# Allegro board demob2.brd
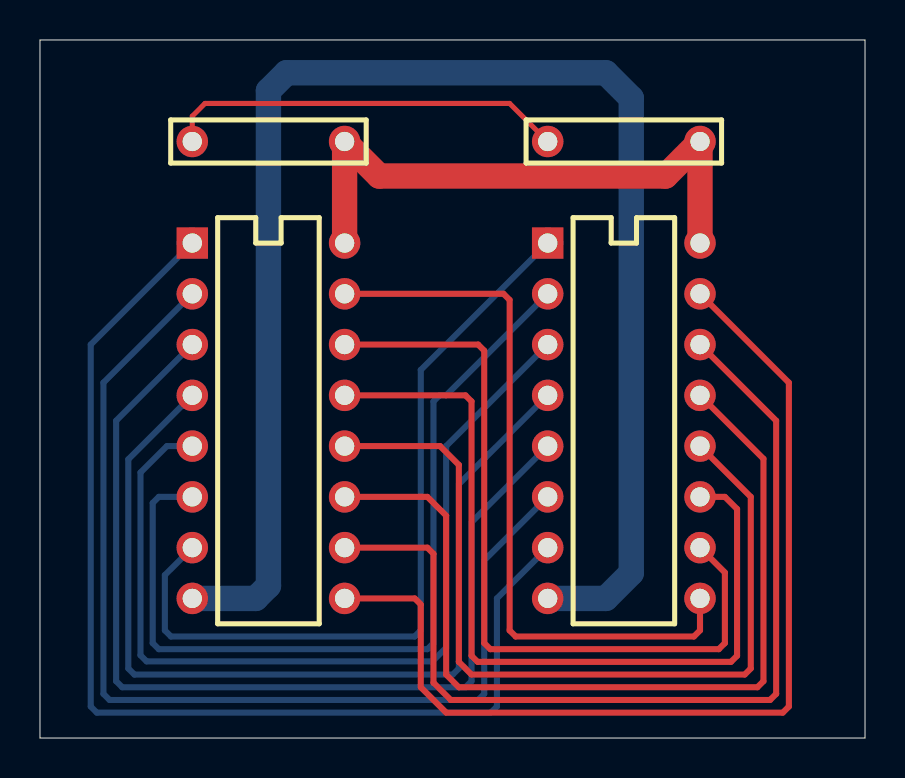
[diagram p0: board, top side]
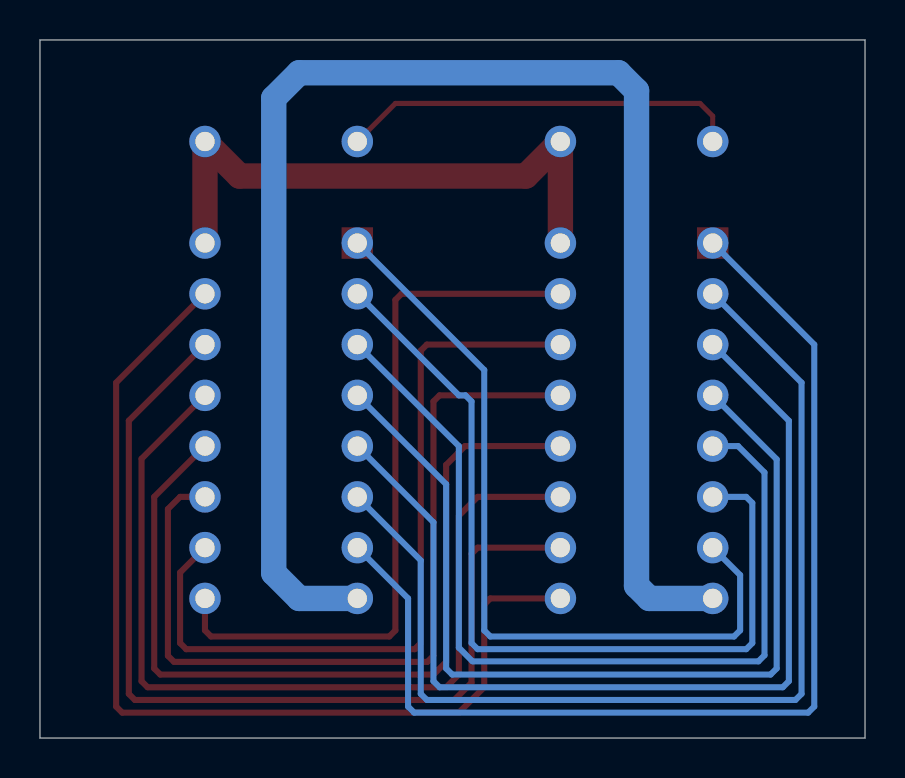
[diagram p1: board, bottom side, seen from below]

Outline 41.27 x 34.93 mm; copper layers: TOP, GND, POWER, INNER1, INNER2, BOTTOM. Coordinates in mm from the lower left corner of the outline.
Outline path: 0,34.93 41.27,34.93 41.27,0 0,0 0,34.93

## Design rules (mm)
nets with their own width: min track width 0.254; nets GND_SIGNAL
nets with their own width: min track width 0.305; nets N01899 N01900 N01901 N01902 N01903 N01904 N01905 N01906 N01907 N01908 N01909 N01910 N01911 N01912
nets with their own width: min track width 1.27; nets GND VCC

## Placement (name value [footprint] x y rotation side)
C1  CAP NP  [AC300100A]  15.24 29.85 180 top
C2  CAP NP  [AC300100A]  33.02 29.85 180 top
U1  74LS158  [DIP16]  7.62 24.77 270 top
U2  74LS158  [DIP16]  25.4 24.77 270 top

## Library data of the parts
C1 C2 = CAP_NP
U1 U2 = 74LS158

## Footprints (pads in the part's own frame, mm; a bottom-side part is the same pattern mirrored in y, then rotated)
AC300100A
  round 1.575 hole 0.965: 1(0,0) 2(7.62,0)
DIP16
  rect 1.575x1.575 hole 0.965: 1(0,0)
  round 1.575 hole 0.965: 2(2.54,0) 3(5.08,0) 4(7.62,0) 5(10.16,0) 6(12.7,0) 7(15.24,0) 8(17.78,0) 9(17.78,7.62) 10(15.24,7.62) 11(12.7,7.62) 12(10.16,7.62) 13(7.62,7.62) 14(5.08,7.62) 15(2.54,7.62) 16(0,7.62)

## Nets
GND: U1.8(TP-8) U2.8(TP-8)
GND_SIGNAL: C1.2(TP-2) C2.2(TP-2)
VCC: C1.1(TP-1) C2.1(TP-1) U1.16(TP-16) U2.16(TP-16)
N01899: U1.2(TP-2) U2.6(TP-6)
N01900: U1.3(TP-3) U2.5(TP-5)
N01901: U1.4(TP-4) U2.4(TP-4)
N01902: U1.5(TP-5) U2.3(TP-3)
N01903: U1.6(TP-6) U2.2(TP-2)
N01904: U1.7(TP-7) U2.1(TP-1)
N01905: U1.9(TP-9) U2.15(TP-15)
N01906: U1.10(TP-10) U2.14(TP-14)
N01907: U1.11(TP-11) U2.13(TP-13)
N01908: U1.12(TP-12) U2.12(TP-12)
N01909: U1.14(TP-14) U2.10(TP-10)
N01910: U1.1(TP-1) U2.7(TP-7)
N01911: U1.13(TP-13) U2.11(TP-11)
N01912: U1.15(TP-15) U2.9(TP-9)

## Routing (per net, layer and track width the routed paths; a pad name or vN(x,y) marks a point on that pad's centre or on a via; arc(x,y) is an arc through that point)
GND: length 76.4
  BOTTOM w1.27: U1.8 10.79,6.99 11.43,7.62 11.43,32.39 12.33,33.28 28.31,33.28 29.58,32.01 29.58,8.25 28.31,6.99 U2.8
GND_SIGNAL: length 20.1
  TOP w0.254: C1.2 7.62,31.11 8.26,31.75 23.5,31.75 C2.2
VCC: length 29.4
  TOP w1.27: U1.16 C1.1 16.97,28.12 31.29,28.12 C2.1 U2.16
N01899: length 52.3
  BOTTOM w0.305: U1.2 3.17,17.78 3.17,2.21 3.48,1.91 21.92,1.91 22.23,2.21 22.23,8.89 U2.6
N01900: length 49.8
  BOTTOM w0.305: U1.3 3.81,15.88 3.81,2.84 4.11,2.54 21.29,2.54 21.59,2.84 21.59,10.8 U2.5
N01901: length 47.3
  BOTTOM w0.305: U2.4 20.95,12.7 20.95,3.48 20.65,3.17 4.72,3.17 4.42,3.48 4.42,13.94 U1.4
N01902: length 45.3
  BOTTOM w0.305: U1.5 6.35,14.61 5.03,13.28 5.03,4.14 5.33,3.84 19.63,3.84 20.32,4.52 20.32,14.61 U2.3
N01903: length 43.5
  BOTTOM w0.305: U1.6 5.94,12.07 5.64,11.76 5.64,4.75 5.94,4.45 19.38,4.45 19.68,4.75 19.68,16.84 19.99,17.14 20.32,17.14 U2.2
N01904: length 39.8
  BOTTOM w0.305: U1.7 6.25,8.15 6.25,5.38 6.55,5.08 18.75,5.08 19.05,5.38 19.05,18.41 U2.1
N01905: length 49.6
  TOP w0.305: U1.9 18.75,6.99 19.05,6.68 19.05,2.54 20.32,1.27 37.16,1.27 37.47,1.57 37.47,17.78 U2.15
N01906: length 47.7
  TOP w0.305: U1.10 19.38,9.52 19.68,9.22 19.68,2.77 20.55,1.91 36.53,1.91 36.83,2.21 36.83,15.88 U2.14
N01907: length 45.3
  TOP w0.305: U1.11 19.38,12.07 20.32,11.13 20.32,3.17 20.95,2.54 35.89,2.54 36.2,2.84 36.2,13.97 U2.13
N01908: length 43.1
  TOP w0.305: U2.12 35.56,12.07 35.56,3.48 35.26,3.17 21.59,3.17 20.95,3.81 20.95,13.67 20.02,14.61 U1.12
N01909: length 39.3
  TOP w0.305: U2.10 34.26,8.28 34.26,4.75 33.96,4.45 22.53,4.45 22.23,4.75 22.23,19.38 21.92,19.68 U1.14
N01910: length 54.9
  BOTTOM w0.305: U2.7 22.86,6.99 22.86,1.57 22.56,1.27 2.84,1.27 2.54,1.57 2.54,19.68 U1.1
N01911: length 42.2
  TOP w0.305: U2.11 34.26,12.07 34.87,11.46 34.87,4.11 34.57,3.81 21.89,3.81 21.59,4.11 21.59,16.84 21.29,17.14 U1.13
N01912: length 36.3
  TOP w0.305: U1.15 23.19,22.22 23.5,21.92 23.5,5.38 23.8,5.08 32.72,5.08 33.02,5.38 U2.9
